# Altium PCB Esark Sign PCB 2.PcbDoc
Units mil, origin at the board's own origin, x right, y up, seen from the top; angles counter-clockwise.
Board outline 5360 x 2550 mil, 2 copper layers (Top Layer, Bottom Layer); 165 components, 74 nets, 331 pads, 48 vias.
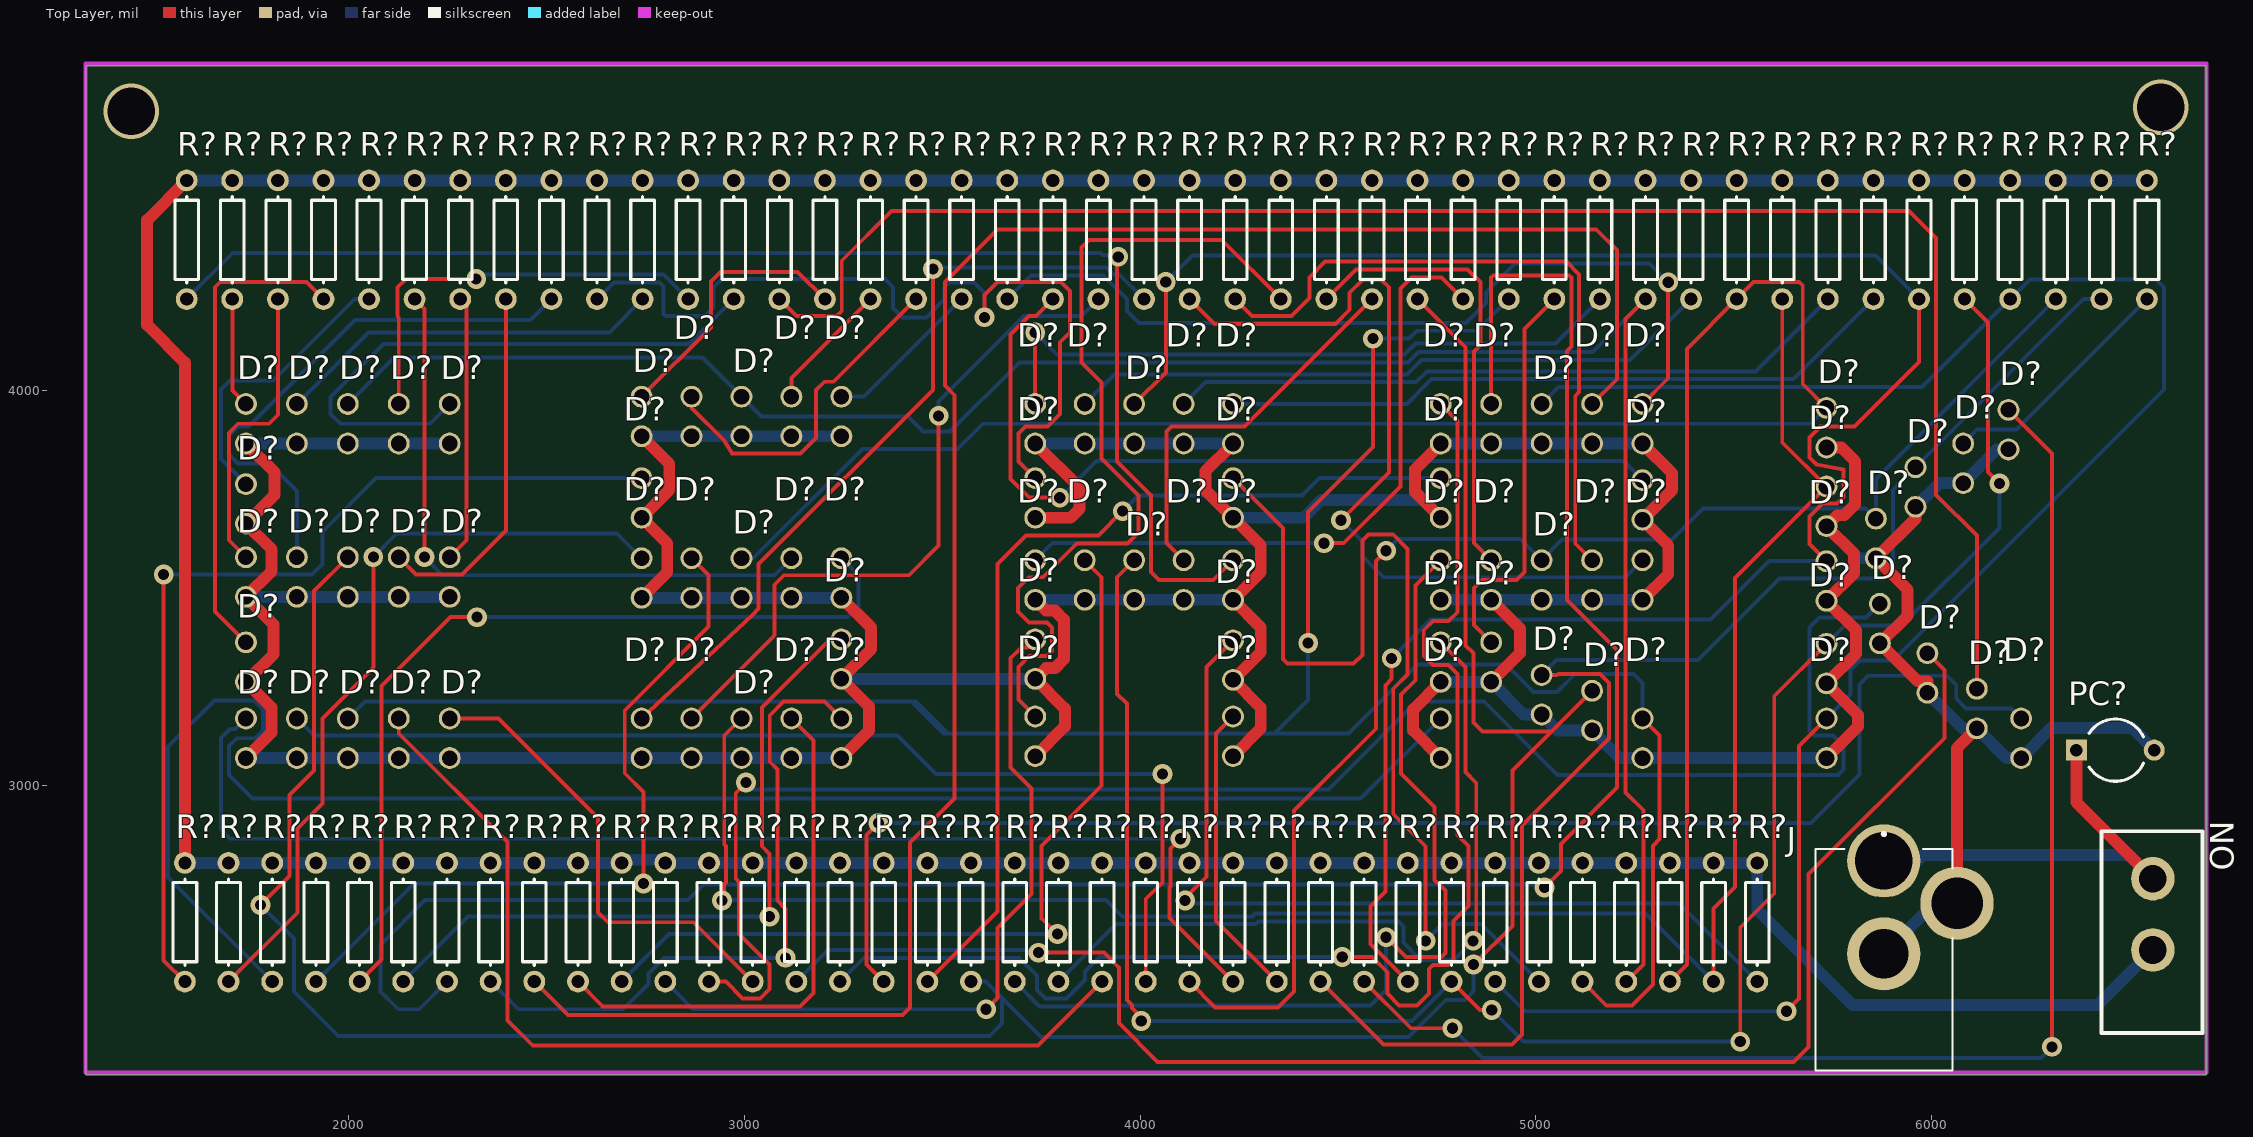
[diagram p0: Top Layer view]
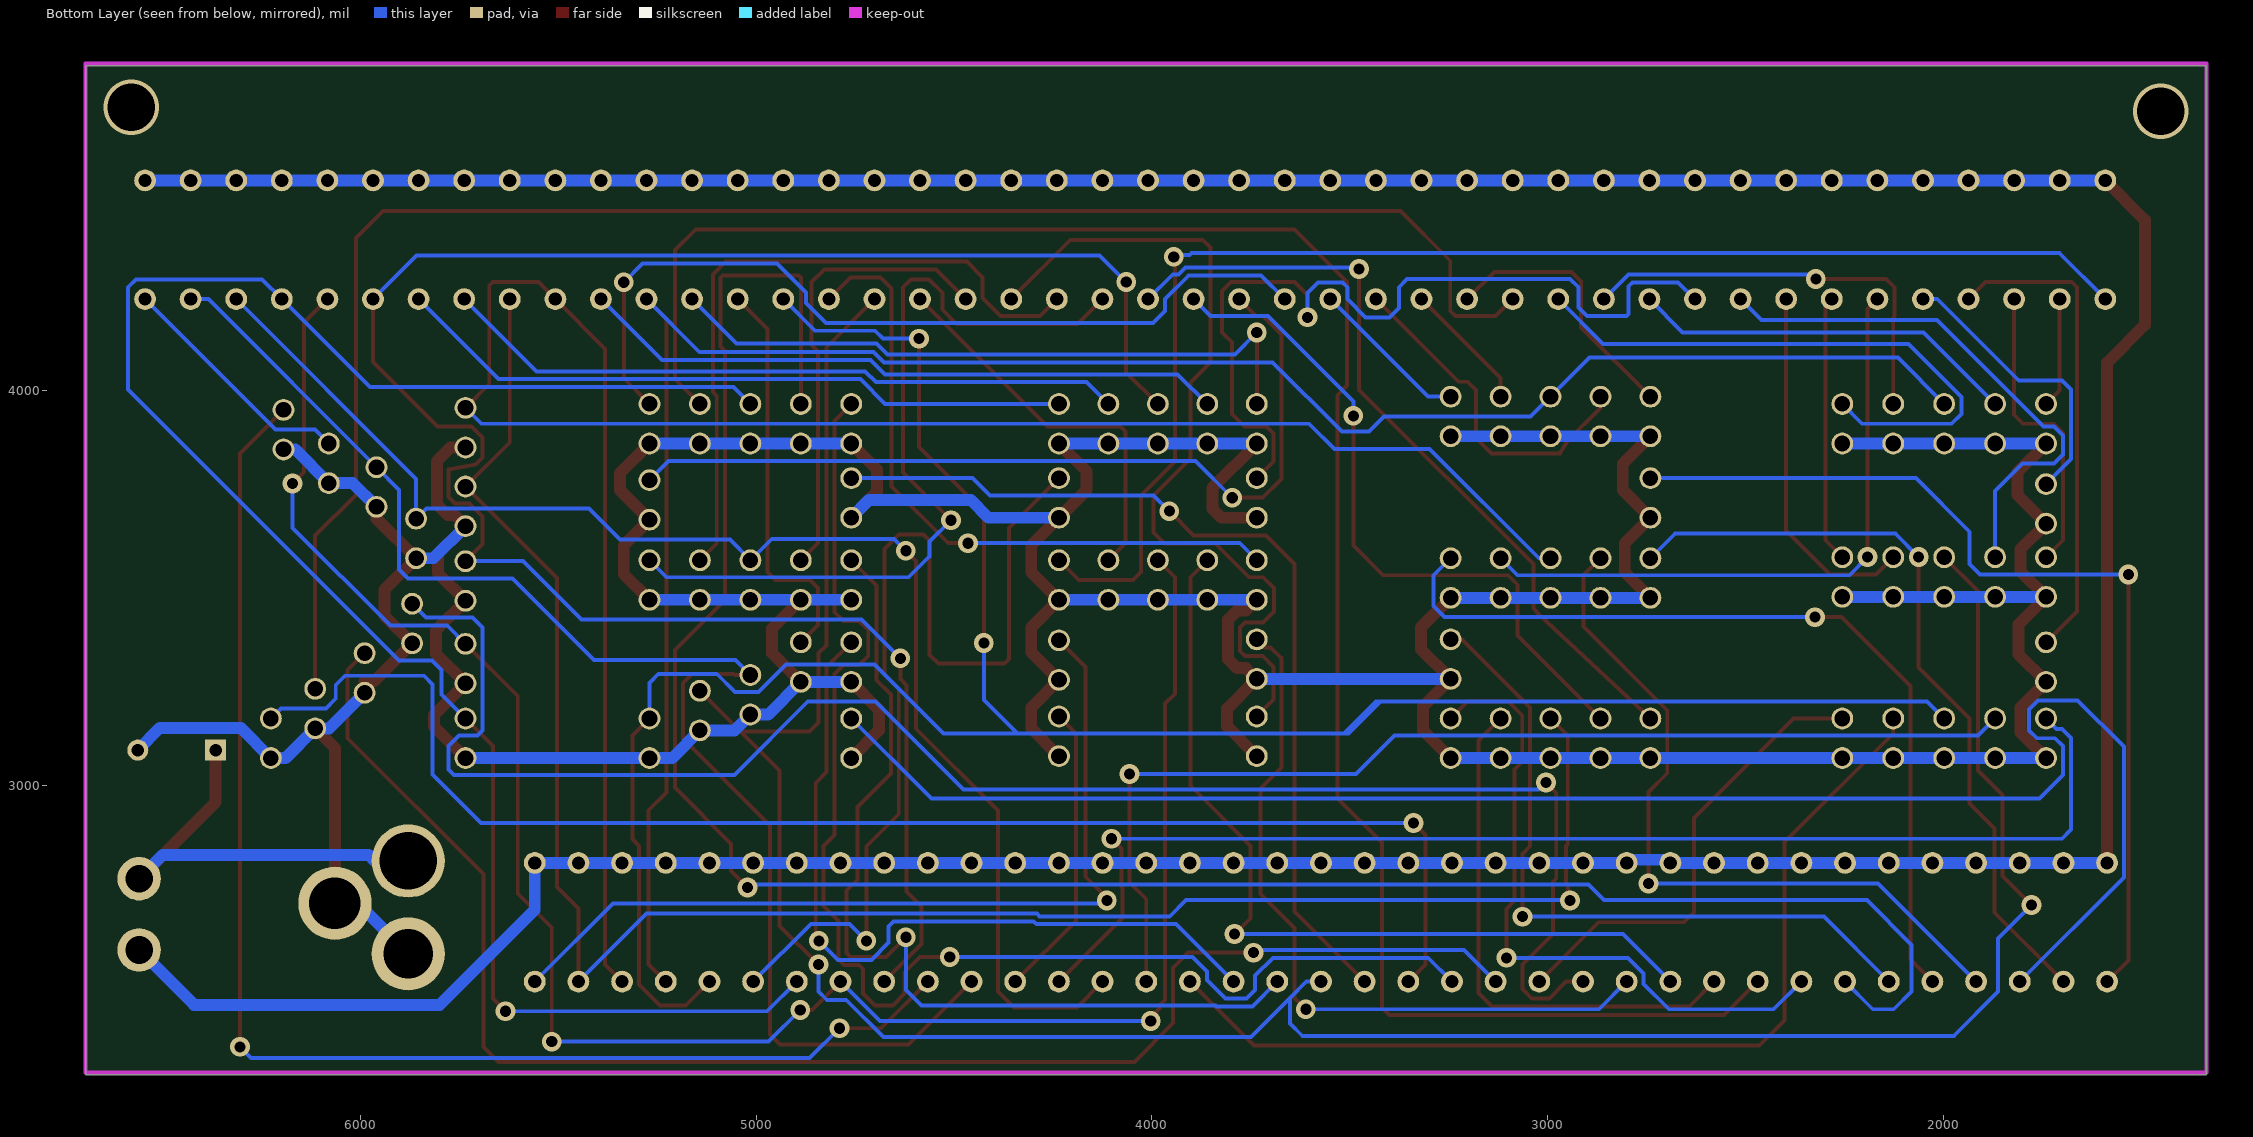
[diagram p1: Bottom Layer view, seen from below]

## Layer stack, top to bottom
Top Solder: solder mask 0.4, Solder Resist, Dk 3.5
Top Layer: signal copper 1.4
Dielectric 1: dielectric 12.6, FR-4, Dk 4.8
Bottom Layer: signal copper 1.4
Bottom Solder: solder mask 0.4, Solder Resist, Dk 3.5

## Board outline
1335,2270 6695,2270 6695,4820 1335,4820

## Design rules (kind name [scope] priority, off if disabled: settings)
Clearance [All] p1: gap=10 ignorepadtopadclearanceinfootprint=FALSE except(0: Arc-Hole Track-Hole SMDPad-Hole THPad-Hole Via-Hole Fill-Hole Poly-Hole Region-Hole Text-Hole)
PolygonConnect [All] p1: connectstyle=Relief reliefconductorwidth=10 reliefentries=4 polygonreliefangle="90 Angle" airgapwidth=10
RoomDefinition "Esark Sign Schematic2" [InComponentClass('Esark Sign Schematic2')] p1: confinementstyle=ConfineIn formatcopy=TRUE lockcomponents=FALSE outline 7045,1055 11915,1055 11915,1820 7045,1820
RoutingVias [All] p1: holewidth=28 width=50 viastyle="Through Hole" minholewidth=28 minwidth=50 maxholewidth=28 maxwidth=50
SolderMaskExpansion [All] p1: expansion=4 istentingtop=FALSE
Width GND [InNet('GND')] p1: maxlimit=30 minlimit=30 preferedwidth=30 minimp=50.000000 maximp=50.000000 favimp=50.000000
Width 5V_IN [InNet('5V_IN')] p2: maxlimit=30 minlimit=30 preferedwidth=30 minimp=50.000000 maximp=50.000000 favimp=50.000000
Width 5V [InNet('5V')] p3: maxlimit=30 minlimit=30 preferedwidth=30 minimp=50.000000 maximp=50.000000 favimp=50.000000
30 further rules are at their usual default settings.

## Classes and differential pairs
component class "Esark Sign Schematic2": PC?

## Components (designator, comment, footprint, x,y, rotation, side; value= is the part's Value field where it differs from the comment)
D? "LED0" LED-0 6115,3195 r90 top
D? "LED0" LED-0 2992.5,3525 r90 top
D? "LED0" LED-0 2992.5,3120 r90 top
D? "LED0" LED-0 5015,3915 r90 top
D? "LED0" LED-0 2992.5,3933.44 r90 top
D? "LED0" LED-0 1997.5,3120 r90 top
D? "LED0" LED-0 3985,3915 r90 top
D? "LED0" LED-0 1997.5,3527.5 r90 top
D? "LED0" LED-0 6080.52,3815 r90 top
D? "LED0" LED-0 3985,3520 r90 top
D? "LED0" LED-0 5015,3230 r90 top
D? "LED0" LED-0 5015,3520 r90 top
D? "LED0" LED-0 1997.5,3915 r90 top
D? "LED0" LED-0 6226.95,3120 r90 top
D? "LED0" LED-0 4887.5,3520 r90 top
D? "LED0" LED-0 5270,3520 r90 top
D? "LED0" LED-0 5735,3706.25 r90 top
D? "LED0" LED-0 5142.5,3190 r90 top
D? "LED0" LED-0 5142.5,3915 r90 top
D? "LED0" LED-0 6195,3900 r90 top
D? "LED0" LED-0 5735,3517.5 r90 top
D? "LED0" LED-0 5960,3755 r90 top
D? "LED0" LED-0 4887.5,3915 r90 top
D? "LED0" LED-0 5735,3905 r90 top
D? "LED0" LED-0 5735,3308.75 r90 top
D? "LED0" LED-0 5270,3915 r90 top
D? "LED0" LED-0 5990,3285 r90 top
D? "LED0" LED-0 5270,3120 r90 top
D? "LED0" LED-0 5270,3722.5 r90 top
D? "LED0" LED-0 5735,3120 r90 top
D? "LED0" LED-0 5142.5,3520 r90 top
D? "LED0" LED-0 4760,3120 r90 top
D? "LED0" LED-0 5870,3410 r90 top
D? "LED0" LED-0 5860,3625 r90 top
D? "LED0" LED-0 3245,3525 r90 top
D? "LED0" LED-0 2740,3120 r90 top
D? "LED0" LED-0 4760,3312.5 r90 top
D? "LED0" LED-0 4235,3125 r90 top
D? "LED0" LED-0 4760,3520 r90 top
D? "LED0" LED-0 4235,3317.5 r90 top
D? "LED0" LED-0 3860,3915 r90 top
D? "LED0" LED-0 4235,3520 r90 top
D? "LED0" LED-0 3735,3915 r90 top
D? "LED0" LED-0 4887.5,3312.5 r90 top
D? "LED0" LED-0 2866.25,3120 r90 top
D? "LED0" LED-0 3245,3120 r90 top
D? "LED0" LED-0 4110,3520 r90 top
D? "LED0" LED-0 3118.75,3120 r90 top
D? "LED0" LED-0 4110,3915 r90 top
D? "LED0" LED-0 4760,3727.5 r90 top
D? "LED0" LED-0 4760,3915 r90 top
D? "LED0" LED-0 3735,3125 r90 top
D? "LED0" LED-0 4235,3915 r90 top
D? "LED0" LED-0 4235,3727.5 r90 top
D? "LED0" LED-0 3860,3520 r90 top
D? "LED0" LED-0 3735,3520 r90 top
D? "LED0" LED-0 3735,3320 r90 top
D? "LED0" LED-0 3245,3320 r90 top
D? "LED0" LED-0 2740,3933.44 r90 top
D? "LED0" LED-0 3118.75,3933.44 r90 top
D? "LED0" LED-0 2740,3525 r90 top
D? "LED0" LED-0 2255,3915 r90 top
D? "LED0" LED-0 2866.25,3933.44 r90 top
D? "LED0" LED-0 2866.25,3525 r90 top
D? "LED0" LED-0 1868.75,3915 r90 top
D? "LED0" LED-0 3118.75,3525 r90 top
D? "LED0" LED-0 2740,3727.5 r90 top
D? "LED0" LED-0 2126.25,3915 r90 top
D? "LED0" LED-0 3245,3933.44 r90 top
D? "LED0" LED-0 2255,3527.5 r90 top
D? "LED0" LED-0 1740,3915 r90 top
D? "LED0" LED-0 1868.75,3527.5 r90 top
D? "LED0" LED-0 2126.25,3527.5 r90 top
D? "LED0" LED-0 1868.75,3120 r90 top
D? "LED0" LED-0 1740,3527.5 r90 top
D? "LED0" LED-0 1740,3712.5 r90 top
D? "LED0" LED-0 1740,3312.5 r90 top
D? "LED0" LED-0 2255,3120 r90 top
D? "LED0" LED-0 3735,3727.5 r90 top
D? "LED0" LED-0 2126.25,3120 r90 top
D? "LED0" LED-0 1740,3120 r90 top
J "EJ508A" MPD_EJ508A 5880,2702.95 r0 top
PC? "33u" CAPR5-4X5 6465,3090 r0 top
R? "Res1" AXIAL-0.3 3088.18,4380 r90 top value=200
R? "Res1" AXIAL-0.3 6084.09,4380 r90 top value=200
R? "Res1" AXIAL-0.3 5968.86,4380 r90 top value=200
R? "Res1" AXIAL-0.3 5118.4,2655 r90 top value=200
R? "Res1" AXIAL-0.3 5449.6,2655 r90 top value=200
R? "Res1" AXIAL-0.3 5228.8,2655 r90 top value=200
R? "Res1" AXIAL-0.3 6314.54,4380 r90 top value=200
R? "Res1" AXIAL-0.3 6545,4380 r90 top value=200
R? "Res1" AXIAL-0.3 5339.2,2655 r90 top value=200
R? "Res1" AXIAL-0.3 6199.32,4380 r90 top value=200
R? "Res1" AXIAL-0.3 6429.77,4380 r90 top value=200
R? "Res1" AXIAL-0.3 4701.36,4380 r90 top value=200
R? "Res1" AXIAL-0.3 3572.82,2655 r90 top value=200
R? "Res1" AXIAL-0.3 3352.02,2655 r90 top value=200
R? "Res1" AXIAL-0.3 4931.81,4380 r90 top value=200
R? "Res1" AXIAL-0.3 2248.03,2655 r90 top value=200
R? "Res1" AXIAL-0.3 4124.81,2655 r90 top value=200
R? "Res1" AXIAL-0.3 2468.83,2655 r90 top value=200
R? "Res1" AXIAL-0.3 3779.54,4380 r90 top value=200
R? "Res1" AXIAL-0.3 5623.18,4380 r90 top value=200
R? "Res1" AXIAL-0.3 4566.41,2655 r90 top value=200
R? "Res1" AXIAL-0.3 5507.95,4380 r90 top value=200
R? "Res1" AXIAL-0.3 4676.81,2655 r90 top value=200
R? "Res1" AXIAL-0.3 4240.45,4380 r90 top value=200
R? "Res1" AXIAL-0.3 4787.21,2655 r90 top value=200
R? "Res1" AXIAL-0.3 2910.43,2655 r90 top value=200
R? "Res1" AXIAL-0.3 3664.32,4380 r90 top value=200
R? "Res1" AXIAL-0.3 4125.22,4380 r90 top value=200
R? "Res1" AXIAL-0.3 3131.22,2655 r90 top value=200
R? "Res1" AXIAL-0.3 4897.6,2655 r90 top value=200
R? "Res1" AXIAL-0.3 4456.01,2655 r90 top value=200
R? "Res1" AXIAL-0.3 4470.91,4380 r90 top value=200
R? "Res1" AXIAL-0.3 1806.44,2655 r90 top value=200
R? "Res1" AXIAL-0.3 5277.5,4380 r90 top value=200
R? "Res1" AXIAL-0.3 5853.63,4380 r90 top value=200
R? "Res1" AXIAL-0.3 3894.77,4380 r90 top value=200
R? "Res1" AXIAL-0.3 2137.64,2655 r90 top value=200
R? "Res1" AXIAL-0.3 3462.42,2655 r90 top value=200
R? "Res1" AXIAL-0.3 1590.23,4380 r90 top value=200
R? "Res1" AXIAL-0.3 3793.62,2655 r90 top value=200
R? "Res1" AXIAL-0.3 2027.24,2655 r90 top value=200
R? "Res1" AXIAL-0.3 5047.04,4380 r90 top value=200
R? "Res1" AXIAL-0.3 4816.59,4380 r90 top value=200
R? "Res1" AXIAL-0.3 3241.62,2655 r90 top value=200
R? "Res1" AXIAL-0.3 5738.41,4380 r90 top value=200
R? "Res1" AXIAL-0.3 5560,2655 r90 top value=200
R? "Res1" AXIAL-0.3 4345.61,2655 r90 top value=200
R? "Res1" AXIAL-0.3 2579.23,2655 r90 top value=200
R? "Res1" AXIAL-0.3 2800.03,2655 r90 top value=200
R? "Res1" AXIAL-0.3 3683.22,2655 r90 top value=200
R? "Res1" AXIAL-0.3 4586.13,4380 r90 top value=200
R? "Res1" AXIAL-0.3 5162.27,4380 r90 top value=200
R? "Res1" AXIAL-0.3 5392.72,4380 r90 top value=200
R? "Res1" AXIAL-0.3 4355.68,4380 r90 top value=200
R? "Res1" AXIAL-0.3 2358.43,2655 r90 top value=200
R? "Res1" AXIAL-0.3 2689.63,2655 r90 top value=200
R? "Res1" AXIAL-0.3 4010,4380 r90 top value=200
R? "Res1" AXIAL-0.3 5008.01,2655 r90 top value=200
R? "Res1" AXIAL-0.3 1696.04,2655 r90 top value=200
R? "Res1" AXIAL-0.3 1916.84,2655 r90 top value=200
R? "Res1" AXIAL-0.3 3318.63,4380 r90 top value=200
R? "Res1" AXIAL-0.3 2166.36,4380 r90 top value=200
R? "Res1" AXIAL-0.3 2742.5,4380 r90 top value=200
R? "Res1" AXIAL-0.3 2972.95,4380 r90 top value=200
R? "Res1" AXIAL-0.3 3549.09,4380 r90 top value=200
R? "Res1" AXIAL-0.3 3203.41,4380 r90 top value=200
R? "Res1" AXIAL-0.3 3433.86,4380 r90 top value=200
R? "Res1" AXIAL-0.3 1585.64,2655 r90 top value=200
R? "Res1" AXIAL-0.3 2857.73,4380 r90 top value=200
R? "Res1" AXIAL-0.3 1705.45,4380 r90 top value=200
R? "Res1" AXIAL-0.3 4014.41,2655 r90 top value=200
R? "Res1" AXIAL-0.3 3020.83,2655 r90 top value=200
R? "Res1" AXIAL-0.3 2281.59,4380 r90 top value=200
R? "Res1" AXIAL-0.3 2051.14,4380 r90 top value=200
R? "Res1" AXIAL-0.3 1935.91,4380 r90 top value=200
R? "Res1" AXIAL-0.3 1820.68,4380 r90 top value=200
R? "Res1" AXIAL-0.3 4235.21,2655 r90 top value=200
R? "Res1" AXIAL-0.3 2396.82,4380 r90 top value=200
R? "Res1" AXIAL-0.3 2512.04,4380 r90 top value=200
R? "Res1" AXIAL-0.3 3904.02,2655 r90 top value=200
R? "Res1" AXIAL-0.3 2627.27,4380 r90 top value=200
? "SPST Switch" "SPST Switch" 6560,2585 r90 top

## Footprints (in the part's own frame and the unit in brackets; to place one, negate y for a bottom-side part, rotate by r counter-clockwise, add the part's x,y. Pads: shape width x height; smd on the part's side, far side on the other; paste and mask are expansions set on the pad)
AXIAL-0.3 [mm] "Axial Device, Thru-Hole; 2 Leads; 0.3 in Pin Spacing"
  round 1.4 hole 0.85: 1(-3.81,0) 2(3.81,0)
  silkscreen extent -2.77,-0.76 2.77,0.76
CAPR5-4X5 [mm] "Capacitor; 2 Leads"
  rect 1.35x1.35 hole 0.8: 1(-2.5,0)
  round 1.35 hole 0.8: 2(2.5,0)
  silkscreen extent -1.69,-2 1.82,2
LED-0 [mm] "LED; 2 Leads"
  round 1.4 hole 1: 1(1.27,0) 2(-1.27,0)
MPD_EJ508A [mil]
  round 185 hole 145: 1(0,107)
  round 185 hole 125: 2(0,-127.95)
  round 185 hole 130: 3(185,0)
  silkscreen extent -173,-423 173,179
"SPST Switch" [mil] "SW"
  round 110 hole 70: 1(0,0) 2(180,0)
  silkscreen extent -210,-125 300,130

## Part data
D? D? D? D? D? D? D? D? D? D? D? D? D? D? D? D? D? D? D? D? D? D? D? D? D? D? D? D? D? D? D? D? D? D? D? D? D? D? D? D? D? D? D? D? D? D? D? D? D? D? D? D? D? D? D? D? D? D? D? D? D? D? D? D? D? D? D? D? D? D? D? D? D? D? D? D? D? D? D? D? D?: "Typical INFRARED GaAs LED", LatestRevisionDate=08-Jul-2005, LatestRevisionNote="Mech Layer 1 removed.", PackageDescription="LED; 2 Leads", PackageReference=LED-0, Published=8-Jun-2000, Publisher="Altium Limited"
J: "Power Barrel Connector Jack 2.10mm ID _0.083_, 5.50mm OD _0.217_ Through Hole, Right Angle", Package="Non-Standard MPD", Availability=Unavailable, MF=MPD, MP=EJ508A, Price=None, SnapEDA_Link=https://www.snapeda.com/parts/EJ508A/MPD%20%28Memory%20Protection%20Devices%29/view-part/474399/?ref=snap
PC?: library part Cap2, "Capacitor", PackageDescription="Capacitor; 2 Leads", PackageReference=CAPR5-4X5, Published=23-Sep-2002, Publisher="Altium Limited"
R? R? R? R? R? R? R? R? R? R? R? R? R? R? R? R? R? R? R? R? R? R? R? R? R? R? R? R? R? R? R? R? R? R? R? R? R? R? R? R? R? R? R? R? R? R? R? R? R? R? R? R? R? R? R? R? R? R? R? R? R? R? R? R? R? R? R? R? R? R? R? R? R? R? R? R? R? R? R? R? R?: "Resistor", LatestRevisionDate=17-Jul-2002, LatestRevisionNote="Re-released for DXP Platform.", PackageDescription="Axial Device, Thru-Hole; 2 Leads; 0.3 in Pin Spacing", PackageReference=AXIAL-0.3, Published=8-Jun-2000, Publisher="Altium Limited"

## Via types
v1: diameter 50, hole 28, Top Layer to Bottom Layer, 46 vias
v2: diameter 140, hole 120, Top Layer to Bottom Layer, 2 vias

## Nets (pads, with @x,y where several pads share a name; then routed paths per layer and width w, separated by ;. In a path a pad name is that pad's centre, name@x,y a point inside that pad or via, vN(x,y) a via of type N, cw(c..) or ccw(c..) an arc to the next point about the centre after c; other vN are vias at no path point)
5V: ?.1 R?.2 | length 12017.9
  Top Layer w30: R?.2@1585.64,2805 1585.64,4069.36 1490,4165 1490,4429.77 R?.2@1590.23,4530
  Bottom Layer w30: R?.2@1585.64,2805 1696.04,2805 1806.44,2805 1916.84,2805 2027.24,2805 2137.64,2805 2248.03,2805 2358.43,2805 2468.83,2805 2579.23,2805 2689.63,2805 2697.63,2813 2792.03,2813 2800.03,2805 2910.43,2805 3020.83,2805 3131.23,2805 3241.62,2805 3352.02,2805 3462.42,2805 3572.82,2805 3683.22,2805 3793.62,2805 3904.02,2805 4014.42,2805 4124.81,2805 4235.21,2805 4345.61,2805 4456.01,2805 4566.41,2805 4676.81,2805 4787.21,2805 4897.61,2805 5008,2805 5118.4,2805 5228.8,2805 5339.2,2805 5449.6,2805 5560,2805 5560,2686 5800,2446 6421,2446 ?.1 ; R?.2@1590.23,4530 1705.45,4530 1820.68,4530 1935.91,4530 2051.14,4530 2166.36,4530 2281.59,4530 2396.82,4530 2512.04,4530 2627.27,4530 2742.5,4530 2857.73,4530 2972.95,4530 3088.18,4530 3203.41,4530 3318.64,4530 3433.86,4530 3549.09,4530 3664.32,4530 3779.54,4530 3894.77,4530 4010,4530 4125.23,4530 4240.45,4530 4355.68,4530 4470.91,4530 4586.13,4530 4701.36,4530 4816.59,4530 4931.82,4530 5047.04,4530 5162.27,4530 5277.5,4530 5392.72,4530 5507.95,4530 5623.18,4530 5738.41,4530 5853.63,4530 5968.86,4530 6084.09,4530 6199.32,4530 6314.54,4530 6429.77,4530 R?.2@6545,4530
5V_IN: ?.2 J.1 PC?.1 | length 1116.4
  Top Layer w30: PC?.1 6366.57,2958.43 ?.2
  Bottom Layer w30: J.1@5880,2809.45 5964.45,2809.45 5980,2825 6500,2825 ?.2
GND: D?.2 J.2 J.3 PC?.2 | length 16458.7
  Top Layer w30: D?.2@1740,3070 1805,3135 1805,3197.5 1740,3262.5 1810,3332.5 1810,3407.5 1740,3477.5 1805,3542.5 1805,3597.5 1740,3662.5 1812.56,3735.06 1812.56,3792.44 D?.2@1740,3865 ; D?.2@2740,3475 2805,3540 2805,3612.5 2740,3677.5 2810,3747.5 2810,3813.44 D?.2@2740,3883.44 ; D?.2@3245,3070 3315,3140 3315,3200 3245,3270 3320,3345 3320,3400 D?.2@3245,3475 ; D?.2@3735,3075 3810,3150 3810,3195 3735,3270 3762.44,3297.44 3785,3297.44 3807.56,3320 3807.56,3420 3785,3442.56 3762.44,3442.56 D?.2@3735,3470 ; D?.2@3735,3677.5 3824.5,3677.5 3847,3700 3847,3753 D?.2@3735,3865 ; D?.2@4235,3075 4305,3145 4305,3197.5 4235,3267.5 4305,3337.5 4305,3400 4235,3470 4305,3540 4305,3607.5 4165,3747.5 4165,3795 D?.2@4235,3865 ; D?.2@4760,3070 4690,3140 4690,3192.5 D?.2@4760,3262.5 ; D?.2@4760,3677.5 4695,3742.5 4695,3800 D?.2@4760,3865 ; D?.2@4887.5,3262.5 4960,3335 4960,3397.5 D?.2@4887.5,3470 ; D?.2@5270,3470 5335,3535 5335,3607.5 5270,3672.5 5345,3747.5 5345,3790 D?.2@5270,3865 ; D?.2@5735,3070 5815,3150 5815,3178.75 5735,3258.75 5810,3333.75 5810,3392.5 5735,3467.5 5805,3537.5 5805,3586.25 5735,3656.25 5762.44,3683.69 5780,3683.69 5807.56,3711.25 5807.56,3820 5772.56,3855 D?.2@5735,3855 ; D?.2@5960,3705 5960,3675 5860,3575 5940,3495 5940,3430 5870,3360 5966,3264 5990,3264 D?.2@5990,3235 ; J.3@6064.65,2702.95 6064.65,3094.65 D?.2@6115,3145
  Bottom Layer w30: D?.2@1740,3070 1868.75,3070 1997.5,3070 2126.25,3070 2255,3070 2740,3070 2866.25,3070 2992.5,3070 3118.75,3070 D?.2@3245,3070 ; D?.2@1740,3477.5 1868.75,3477.5 1997.5,3477.5 2126.25,3477.5 D?.2@2255,3477.5 ; D?.2@1740,3865 1868.75,3865 1997.5,3865 2126.25,3865 D?.2@2255,3865 ; D?.2@2740,3475 2866.25,3475 2992.5,3475 3118.75,3475 D?.2@3245,3475 ; D?.2@2740,3883.44 2866.25,3883.44 2992.5,3883.44 3118.75,3883.44 D?.2@3245,3883.44 ; D?.2@3245,3270 D?.2@3735,3270 ; D?.2@3735,3470 3860,3470 3985,3470 4110,3470 D?.2@4235,3470 ; D?.2@3735,3865 3860,3865 3985,3865 4110,3865 D?.2@4235,3865 ; D?.2@4235,3677.5 4413.2,3677.5 4458.08,3722.38 4715.12,3722.38 D?.2@4760,3677.5 ; D?.2@4760,3262.5 4887.5,3262.5 4970,3180 5015,3180 5055,3140 5142.5,3140 5212.5,3070 5270,3070 D?.2@5735,3070 ; D?.2@4760,3470 4887.5,3470 5015,3470 5142.5,3470 D?.2@5270,3470 ; D?.2@4760,3865 4887.5,3865 5015,3865 5142.5,3865 D?.2@5270,3865 ; D?.2@5735,3656.25 5816.25,3575 D?.2@5860,3575 ; J.2 6007.95,2702.95 J.3@6064.65,2702.95 ; D?.2@5960,3705 6020,3765 6080.52,3765 6165.52,3850 D?.2@6195,3850 ; D?.2@5990,3235 6080,3145 6115,3145 6190,3070 6226.95,3070 6302.95,3146 6507.43,3146 PC?.2
LED1: D?.1@1740,3965 R?.1@1705.45,4230 | length 279.3
  Top Layer w10: R?.1@1705.45,4230 1705.45,3999.55 D?.1@1740,3965
NetD?_1: D?.1@6080.52,3865 R?.1@6545,4230 | length 615.7
  Bottom Layer w10: D?.1@6080.52,3865 6115.52,3900 6215,3900 R?.1@6545,4230
NetLabel92: D?.1@1740,3762.5 R?.1@2051.14,4230 | length 733.6
  Bottom Layer w10: D?.1@1740,3762.5 1677,3825.5 1677,4001 1700,4024 1809,4024 2015,4230 R?.1@2051.14,4230
NetLabel93: D?.1@1740,3577.5 R?.1@1820.68,4230 | length 767.2
  Top Layer w10: D?.1@1740,3577.5 1697,3620.5 1697,3892 1720,3915 1798,3915 1820.68,3937.68 R?.1@1820.68,4230
NetLabel94: D?.1@1740,3362.5 R?.1@1935.91,4230 | length 1226.9
  Top Layer w10: D?.1@1740,3362.5 1662,3440.5 1662,4260 1675,4273 1892.91,4273 R?.1@1935.91,4230
NetLabel95: D?.1@2255,3577.5 R?.1@2281.59,4230 | length 686.7
  Top Layer w10: D?.1@2255,3577.5 2298,3620.5 2298,4230 R?.1@2281.59,4230
NetLabel96: D?.1@2126.25,3577.5 R?.1@2396.82,4230 | length 919.7
  Top Layer w10: D?.1@2126.25,3577.5 2169.75,3534 2286,3534 2396.82,3644.82 R?.1@2396.82,4230
NetLabel97: D?.1@1868.75,3577.5 R?.1@2512.04,4230 | length 1383.5
  Bottom Layer w10: D?.1@1868.75,3577.5 1868.75,3745.25 1800,3814 1720,3814 1697,3837 1697,3885 1720,3908 1747,3908 2016,4177 2459.04,4177 R?.1@2512.04,4230
NetLabel98: D?.1@3735,3777.5 R?.1@2627.27,4230 | length 2212.3
  Top Layer w10: v1(3607,4184) 3607,4240 3640,4273 3800,4273 3823,4250 3823,4146 3798,4121 3798,3940 3766,3908 3710,3908 3692.44,3890.44 3692.44,3820.06 D?.1@3735,3777.5
  Bottom Layer w10: R?.1@2627.27,4230 2669.83,4272.56 2785,4272.56 2795,4262.56 2795,4192.86 2800.86,4187 2900,4187 2922,4209 2922,4260 2943,4281 3355,4281 3376,4260 3376,4208 3400,4184 3460,4184 3506,4230 3506,4260 3518.56,4272.56 3580,4272.56 3607,4245.56 v1(3607,4184)
NetLabel99: D?.1@2255,3170 R?.1@3020.83,2505 | length 1180.7
  Top Layer w10: D?.1@2255,3170 2378,3170 2630,2918 2630,2680 2655,2655 2870.83,2655 R?.1@3020.83,2505
NetLabel100: D?.1@2126.25,3170 R?.1@3904.02,2505 | length 2473.5
  Top Layer w10: D?.1@2126.25,3170 2126.25,3132.25 2401,2857.5 2401,2406.92 2464.92,2343 3742.02,2343 R?.1@3904.02,2505
NetLabel101: D?.1@1868.75,3170 R?.1@4014.42,2505 | length 2788.8
  Top Layer w10: R?.1@4014.42,2505 4014.42,2713.42 4056.98,2755.98 v1(4056.98,3030)
  Bottom Layer w10: D?.1@1868.75,3170 1911.75,3127 3387,3127 3484,3030 v1(4056.98,3030)
NetLabel102: D?.1@1740,3170 R?.1@4235.21,2505 | length 3189
  Top Layer w10: v1(4102,2866) 4076.98,2840.98 4076.98,2745.42 4074,2742.44 4074,2666.21 R?.1@4235.21,2505
  Bottom Layer w10: D?.1@1740,3170 1713.58,3143.58 1700,3143.58 1677,3120.58 1677,2889 1700,2866 v1(4102,2866)
NetLabel103: D?.1@1868.75,3965 R?.1@2742.5,4230 | length 983.5
  Bottom Layer w10: D?.1@1868.75,3965 2049.75,4146 2658.5,4146 R?.1@2742.5,4230
NetLabel104: D?.1@2126.25,3965 R?.1@2857.73,4230 | length 1070.5
  Top Layer w10: D?.1@2126.25,3965 2126.25,4183.75 2123,4187 2123,4260 2144,4281 v1(2322,4281)
  Bottom Layer w10: v1(2322,4281) 2333.56,4292.56 2795.17,4292.56 R?.1@2857.73,4230
NetLabel105: D?.1@2255,3965 R?.1@2972.95,4230 | length 1496.3
  Bottom Layer w10: D?.1@2255,3965 2205,3915 1979,3915 1954,3940 1954,3983 2088,4117 2859.95,4117 R?.1@2972.95,4230
NetLabel106: D?.1@6115,3245 R?.1@3088.18,4230 | length 4337
  Top Layer w10: R?.1@3088.18,4230 3131.18,4187 3233,4187 3246,4200 3246,4327 3372,4453 5944,4453 6012,4385 6012,3735 6115,3632 D?.1@6115,3245
NetLabel107: D?.1@2740,3983.44 R?.1@3203.41,4230 | length 690.4
  Top Layer w10: D?.1@2740,3983.44 2915,4158.44 2915,4274 2940,4299 3134.41,4299 R?.1@3203.41,4230
NetLabel108: D?.1@3118.75,3983.44 R?.1@3318.64,4230 | length 329.4
  Top Layer w10: D?.1@3118.75,3983.44 3118.75,4030.11 R?.1@3318.64,4230
NetLabel109: D?.1@2866.25,3983.44 R?.1@3433.86,4230 | length 880.5
  Top Layer w10: D?.1@2866.25,3983.44 2866.25,3955 2949,3872.25 2969,3840 3142,3840 3181.31,3879.31 3181.31,4000 3202.41,4021.1 3224.96,4021.1 R?.1@3433.86,4230
NetLabel110: D?.1@3245,3983.44 R?.1@3549.09,4230 | length 406.2
  Bottom Layer w10: D?.1@3245,3983.44 3302.53,3983.44 R?.1@3549.09,4230
NetLabel111: D?.1@2740,3777.5 R?.1@1585.64,2505 | length 2408.1
  Top Layer w10: v1(1532,3534) 1532,2558.64 R?.1@1585.64,2505
  Bottom Layer w10: v1(1532,3534) 1907,3534 1933,3560 1933,3642 2068.5,3777.5 D?.1@2740,3777.5
NetLabel112: D?.1@2740,3575 R?.1@1696.04,2505 | length 1952.7
  Top Layer w10: R?.1@1696.04,2505 1870,2678.96 1870,2892 1933,2955 1933,3170 2062,3299 v1(2062,3578)
  Bottom Layer w10: v1(2062,3578) 2121,3637 2678,3637 D?.1@2740,3575
NetLabel113: D?.1@2866.25,3575 R?.1@1916.84,2505 | length 1877.9
  Top Layer w10: v1(2745,2753) 2745,2984 2697.44,3031.56 2697.44,3190.44 2909,3402 2909,3532.25 D?.1@2866.25,3575
  Bottom Layer w10: R?.1@1916.84,2505 2164.84,2753 v1(2745,2753)
NetLabel114: D?.1@3118.75,3575 R?.1@2166.36,4230 | length 1626.8
  Top Layer w10: R?.1@2166.36,4230 2191,4205.36 v1(2191,3578)
  Bottom Layer w10: v1(2191,3578) 2237,3532 3075.75,3532 D?.1@3118.75,3575
NetLabel115: D?.1@4760,3362.5 R?.1@3793.62,2505 | length 1990.2
  Top Layer w10: D?.1@4760,3362.5 4822.56,3299.94 4822.56,3034.65 4849.77,3007.44 4849.77,2615.77 v1(4842,2608)
  Bottom Layer w10: R?.1@3793.62,2505 3938.62,2650 4292.24,2650 4299.24,2657 4652.85,2657 4665.71,2644.14 4665.71,2603.29 4709,2560 4794,2560 v1(4842,2608)
NetLabel116: D?.1@4760,3570 R?.1@3683.22,2505 | length 2370.6
  Top Layer w10: v1(4622,2617) 4672,2567 4762,2567 4772,2577 4772,2734.65 4744.65,2762 4744.65,2946 4660,3030.65 4660,3230.5 4696.17,3266.67 4696.17,3506.17 D?.1@4760,3570
  Bottom Layer w10: R?.1@3683.22,2505 3745.78,2442.44 3836.62,2442.44 3839.18,2445 4583,2445 4622,2484 v1(4622,2617)
NetLabel117: D?.1@4760,3777.5 R?.1@3462.42,2505 | length 2339.2
  Top Layer w10: R?.1@3462.42,2505 3640,2682.58 3640,3561 3711.56,3632.56 3894.56,3632.56 v1(3956,3694)
  Bottom Layer w10: v1(3956,3694) 3996,3734 4409.7,3734 4453.2,3777.5 D?.1@4760,3777.5
NetLabel118: D?.1@4760,3965 R?.1@3241.62,2505 | length 3426.9
  Top Layer w10: v1(4511,2567) 4586.5,2567 4625,2528.5 4625,2475 4655,2445 4700,2445 4730,2475 4730,2537 4740,2547 4778,2547 4792,2561 4792,2658 4829.77,2695.77 4829.77,2848 4802.56,2875.21 4802.56,3282.5 4780,3305.06 4740,3305.06 4717,3328.06 4717,3393 4740,3416 4780,3416 4802.56,3438.56 4802.56,3922.44 D?.1@4760,3965
  Bottom Layer w10: R?.1@3241.62,2505 3301.62,2565 3694,2565 3739,2520 3739,2484 3760.56,2462.44 3814.44,2462.44 3861,2509 3861,2530 3898,2567 v1(4511,2567)
NetLabel119: D?.1@3735,3370 R?.1@2800.03,2505 | length 1879.4
  Top Layer w10: v1(3611,2435) 3640,2464 3640,2640 3726,2726 3726,2993 3672.44,3046.56 3672.44,3322.3 3700,3349.86 3714.86,3349.86 D?.1@3735,3370
  Bottom Layer w10: R?.1@2800.03,2505 2870.03,2435 v1(3611,2435)
NetLabel120: D?.1@3860,3570 R?.1@2689.63,2505 | length 2193.4
  Top Layer w10: v1(3791,2625) 3751,2665 3751,2848 3903,3000 3903,3527 D?.1@3860,3570
  Bottom Layer w10: R?.1@2689.63,2505 2809.63,2625 v1(3791,2625)
NetLabel121: D?.1@4235,3175 R?.1@4345.61,2505 | length 751.4
  Top Layer w10: D?.1@4235,3175 4192,3132 4192,2658.61 R?.1@4345.61,2505
NetLabel122: D?.1@4235,3367.5 R?.1@5560,2505 | length 2238.5
  Top Layer w10: v1(4114,2710) 4114,2716 4168,2770 4168,3300.5 D?.1@4235,3367.5
  Bottom Layer w10: v1(4114,2710) 4121.56,2702.44 5362.56,2702.44 R?.1@5560,2505
NetLabel123: D?.1@4235,3570 R?.1@1590.23,4230 | length 3476.3
  Top Layer w10: v1(3944.93,4336.93) 3942,4334 3942,3820 4028,3734 4028,3540 4048,3520 4185,3520 D?.1@4235,3570
  Bottom Layer w10: R?.1@1590.23,4230 1706.23,4346 3899.93,4346 3904.93,4341 3940.85,4341 v1(3944.93,4336.93)
NetLabel124: D?.1@4235,3777.5 R?.1@5008,2505 | length 2552.8
  Top Layer w10: D?.1@4235,3777.5 4361,3651.5 4361,3320 4372,3309 4540,3309 4562,3331 4562,3620 4577,3635 4640,3635 4676.17,3598.83 4676.17,3281.36 4640,3245.19 4640,2929 4722,2847 v1(4722,2608)
  Bottom Layer w10: v1(4722,2608) 4765,2651 4862,2651 R?.1@5008,2505
NetLabel125: D?.1@4235,3965 R?.1@5853.63,4230 | length 1728.4
  Bottom Layer w10: D?.1@4235,3965 4674.44,3965 4737,4027.56 5651.19,4027.56 R?.1@5853.63,4230
NetLabel126: D?.1@4110,3965 R?.1@5738.41,4230 | length 1738.2
  Bottom Layer w10: D?.1@4110,3965 4165,4020 4697.44,4020 4725,4047.56 5555.97,4047.56 R?.1@5738.41,4230
NetLabel127: D?.1@3860,3965 R?.1@5392.72,4230 | length 1642.5
  Bottom Layer w10: D?.1@3860,3965 3935,4040 4675,4040 4711,4076 5238.72,4076 R?.1@5392.72,4230
NetLabel128: D?.1@3735,3965 R?.1@5162.27,4230 | length 1688.9
  Top Layer w10: D?.1@3735,3965 v1(3735,4145.6)
  Bottom Layer w10: v1(3735,4145.6) 3790.6,4090 4668.43,4090 4696.23,4117.8 5050.07,4117.8 R?.1@5162.27,4230
NetLabel129: D?.1@4887.5,3362.5 R?.1@5047.04,4230 | length 1021.2
  Top Layer w10: D?.1@4887.5,3362.5 4844,3406 4844,3500 4864,3520 4952,3520 4972,3540 4972,4154.96 R?.1@5047.04,4230
NetLabel130: D?.1@3735,3570 R?.1@4816.59,4230 | length 1693.9
  Top Layer w10: v1(4465,3613) 4514.81,3613 4658,3756.19 4658,4257 4686,4285 4761.59,4285 R?.1@4816.59,4230
  Bottom Layer w10: D?.1@3735,3570 3778,3613 v1(4465,3613)
NetLabel131: D?.1@4110,3570 R?.1@4586.13,4230 | length 1000.7
  Top Layer w10: D?.1@4110,3570 4067,3613 4067,3895 4080,3908 4264.13,3908 R?.1@4586.13,4230
NetLabel132: D?.1@3735,3175 R?.1@4355.68,4230 | length 2182.2
  Top Layer w10: D?.1@3735,3175 3692.44,3217.56 3692.44,3300 3719.88,3327.44 3765,3327.44 3777.56,3340 3777.56,3400 3765,3412.56 3719.44,3412.56 3692,3440 3692,3500 3719,3527 3754.44,3527 3840,3612.56 3968.56,3612.56 3996,3640 3996,3734 3903,3827 3903,4019 3852,4070 3852,4360 3872,4380 4205.68,4380 R?.1@4355.68,4230
NetLabel133: D?.1@2740,3170 R?.1@4010,4230 | length 2014.8
  Top Layer w10: D?.1@2740,3170 3020,3432 3036,3448 3036,3560.32 3476.53,4000.85 v1(3476.53,4306)
  Bottom Layer w10: v1(3476.53,4306) 3480.53,4310 3915.28,4310 3932.72,4292.56 3947.44,4292.56 R?.1@4010,4230
NetLabel134: D?.1@2866.25,3170 R?.1@3894.77,4230 | length 1756.2
  Top Layer w10: D?.1@2866.25,3170 3076,3379.75 3076,3508 3100,3532 3416,3532 3491,3607 v1(3491,3935)
  Bottom Layer w10: v1(3491,3935) 3491,3971.44 3707,4187.44 3852.21,4187.44 R?.1@3894.77,4230
NetLabel135: D?.1@3118.75,3170 R?.1@2579.23,2505 | length 1351.5
  Top Layer w10: R?.1@2579.23,2505 2641.79,2442.44 3140.44,2442.44 3174,2476 3174,3114.75 D?.1@3118.75,3170
NetLabel136: D?.1@3245,3170 R?.1@2358.43,2505 | length 1686.5
  Top Layer w10: v1(3104,2565) 3104,2689 3083.39,2709.61 3083.39,3041.31 3064,3060.69 3064,3178 3099,3213 3202,3213 D?.1@3245,3170
  Bottom Layer w10: R?.1@2358.43,2505 2428.43,2435 2693,2435 2757,2499 2757,2525 2797,2565 v1(3104,2565)
NetLabel137: D?.1@3245,3370 R?.1@2137.64,2505 | length 1803
  Top Layer w10: v1(3063.39,2669) 3063.39,2827.61 3044,2847 3044,3198 3216,3370 D?.1@3245,3370
  Bottom Layer w10: R?.1@2137.64,2505 2301.64,2669 v1(3063.39,2669)
NetLabel138: D?.1@3245,3575 R?.1@2027.24,2505 | length 2197.5
  Top Layer w10: R?.1@2027.24,2505 2083,2560.76 2083,3251.87 2257.13,3426 v1(2324,3426)
  Bottom Layer w10: v1(2324,3426) 3260,3426 3288,3454 3288,3532 D?.1@3245,3575
NetLabel139: D?.1@4760,3170 R?.1@1806.44,2505 | length 4401.3
  Bottom Layer w10: R?.1@1806.44,2505 1543,2768.44 1543,3099 1660,3216 1760,3216 1783,3193 1783,3140 1763,3120 1717,3120 1697,3100 1697,3027 1756.56,2967.44 4557.44,2967.44 D?.1@4760,3170
NetLabel140: D?.1@4887.5,3965 R?.1@2248.03,2505 | length 5542.5
  Top Layer w10: D?.1@4887.5,3965 4887.5,4284.14 4893.36,4290 5084.14,4290 5090,4284.14 5090,4110 5079,4099 5079,3470 5206,3343 5206,2995 5064,2853 5064,2785 v1(5022,2743)
  Bottom Layer w10: R?.1@2248.03,2505 2178.03,2435 2125,2435 2080,2480 2080,2598 2193,2711 2857,2711 2896,2750 5015,2750 v1(5022,2743)
NetLabel141: D?.1@5142.5,3965 R?.1@2468.83,2505 | length 5073.2
  Top Layer w10: R?.1@2468.83,2505 2553.83,2420 3399,2420 3419,2440 3419,2856 3531,2968 3531,3987 3506.53,4011.47 3506.53,4273 3639.53,4406 5153,4406 5205,4354 5205,4027.5 D?.1@5142.5,3965
NetLabel142: D?.1@5270,3965 R?.1@3664.32,4230 | length 2194.6
  Top Layer w10: D?.1@5270,3965 5335,4030 v1(5335,4272.56)
  Bottom Layer w10: R?.1@3664.32,4230 3724.32,4290 3907,4290 3967,4230 3967,4200 3997,4170 4824,4170 4874,4220 4874,4246.56 4947.44,4320 5287.56,4320 v1(5335,4272.56)
NetLabel143: D?.1@5270,3772.5 R?.1@3779.54,4230 | length 2185
  Top Layer w10: R?.1@3779.54,4230 3736.54,4187 3719,4187 3672.44,4140.44 3672.44,3775.56 3720,3728 v1(3797,3728)
  Bottom Layer w10: v1(3797,3728) 3890,3821 5221.5,3821 D?.1@5270,3772.5
NetLabel144: D?.1@5270,3570 R?.1@4125.23,4230 | length 2110
  Top Layer w10: R?.1@4125.23,4230 4187.79,4167.44 4493.44,4167.44 4529.07,4203.07 4529.07,4246.07 4563,4280 4609,4280 4629,4260 4629,3792 v1(4508,3671)
  Bottom Layer w10: v1(4508,3671) 4562,3617 4562,3580 4615,3527 5227,3527 D?.1@5270,3570
NetLabel145: D?.1@5142.5,3570 R?.1@4240.45,4230 | length 1732.3
  Top Layer w10: R?.1@4240.45,4230 4283.01,4187.44 4382.44,4187.44 4428,4233 4428,4285 4468,4325 5077.43,4325 5110,4292.43 5110,3995 5099.94,3984.94 5099.94,3612.56 D?.1@5142.5,3570
NetLabel146: D?.1@4887.5,3570 R?.1@4470.91,4230 | length 1161.1
  Top Layer w10: R?.1@4470.91,4230 4545.91,4305 4828,4305 4860,4273 4860,4114 4844,4098 4844,3613.5 D?.1@4887.5,3570
NetLabel147: D?.1@1997.5,3577.5 D?.1@5142.5,3240 R?.1@3572.82,2505 R?.1@4701.36,4230 | length 6732.8
  Top Layer w10: v1(1776.5,2698.5) 1850,2772 1850,2977 1912,3039 1912,3492 D?.1@1997.5,3577.5 ; R?.1@4701.36,4230 4823,4108.36 4823,3355 4843,3335 4843,3160 4866,3137 5039.5,3137 ; v1(4843,2548) 4941,2646 4941,3038.5 5039.5,3137 ; D?.1@5142.5,3240 5039.5,3137
  Bottom Layer w10: v1(1776.5,2698.5) 1861,2614 1861,2480 1973,2368 3620,2368 3651,2399 3651,2464 ; R?.1@3572.82,2505 3610,2505 3651,2464 ; v1(4843,2548) 4843,2480 4822,2459 4773,2459 4679,2365 3750,2365 3651,2464
NetLabel148: D?.1@1997.5,3170 D?.1@5270,3170 R?.1@4931.82,4230 R?.1@5118.4,2505 | length 6076.6
  Top Layer w10: v1(4425,3361) 4425,3692 4589,3856 v1(4589,4130) ; R?.1@5118.4,2505 5178.4,2445 5243,2445 5296,2498 5296,2848 5313,2865 5313,3127 D?.1@5270,3170
  Bottom Layer w10: D?.1@1997.5,3170 2040.5,3213 3422.5,3213 ; v1(4425,3361) 4425,3217 4340,3132 ; v1(4589,4130) 4680.15,4130 4700.15,4150 4851.82,4150 R?.1@4931.82,4230 ; D?.1@5270,3170 5270,3260 5247,3283 5100,3283 5054,3237 4995,3237 4925,3307 4701.81,3307 4526.81,3132 4340,3132 ; 3422.5,3213 3434,3213 3515,3132 ; 3422.5,3213 3503.5,3132 3515,3132 ; 3515,3132 4340,3132
NetLabel149: D?.1@1997.5,3965 D?.1@2992.5,3983.44 R?.1@5228.8,2505 R?.1@5277.5,4230 | length 5327.1
  Top Layer w10: R?.1@5228.8,2505 5272,2548.2 5272,2938 5227,2983 5227,4179.5 R?.1@5277.5,4230
  Bottom Layer w10: D?.1@1997.5,3965 2114.5,4082 2893.94,4082 2992.5,3983.44 3042.94,3933 3413,3933 3451,3895 3520,3895 3695,4070 4676.72,4070 4703.46,4096.75 5144.25,4096.75 R?.1@5277.5,4230
NetLabel150: D?.1@2992.5,3575 D?.1@5735,3955 R?.1@5339.2,2505 R?.1@5507.95,4230 | length 5217.2
  Top Layer w10: R?.1@5339.2,2505 5382,2547.8 5382,4104.05 5507.95,4230 5550.95,4273 5666,4273 5675,4264 5675,4015 D?.1@5735,3955
  Bottom Layer w10: D?.1@2992.5,3575 3022,3575 3298,3851 3539,3851 3603,3915 5695,3915 D?.1@5735,3955
NetLabel151: D?.1@2992.5,3170 D?.1@5735,3756.25 R?.1@5449.6,2505 R?.1@5623.18,4230 | length 4971.5
  Top Layer w10: v1(2943,2710) 2948,2715 2948,2750 2953,2755 2953,2848 2949,2852 2949,3126.5 D?.1@2992.5,3170 ; R?.1@5449.6,2505 5449.6,2689.6 5504,2744 5504,3525.25 5735,3756.25 5623.18,3868.07 R?.1@5623.18,4230
  Bottom Layer w10: v1(2943,2710) 2944,2711 3914,2711 3955,2670 4283.95,2670 4290.95,2677 5277.6,2677 R?.1@5449.6,2505
NetLabel152: D?.1@3985,3965 D?.1@5735,3567.5 R?.1@4676.81,2505 R?.1@5968.86,4230 | length 5363.1
  Top Layer w10: D?.1@3985,3965 4065,4045 v1(4065,4273) ; v1(4636,3322) 4636,3269.47 4620,3253.47 4620,2732.76 4582,2694.76 4582,2599.81 R?.1@4676.81,2505 ; D?.1@5735,3567.5 5692,3610.5 5692,3681 5724.69,3713.69 5761.25,3713.69 5777.56,3730 5777.56,3799 5710,3812 5692,3830 5692,3880 5720,3908 5806,3908 5968.86,4070.86 R?.1@5968.86,4230
  Bottom Layer w10: v1(4065,4273) 4132,4340 5858.86,4340 R?.1@5968.86,4230 ; v1(4636,3322) 4734,3420 5442,3420 5589.5,3567.5 D?.1@5735,3567.5
NetLabel153: D?.1@3985,3570 D?.1@5735,3358.75 R?.1@4787.21,2505 R?.1@6084.09,4230 | length 5095.4
  Top Layer w10: D?.1@3985,3570 3942,3527 3942,3232 3966.58,3207.42 3966.58,2458.42 3979.68,2445.32 3979.68,2438.25 4003,2414.93 v1(4003,2405) ; R?.1@4787.21,2505 4859.21,2433 v1(4889,2433) ; v1(5517,2353) 5517,2642 5603,2728 5603,3226.75 D?.1@5735,3358.75 ; R?.1@6084.09,4230 6143.08,4171.01 6143.08,3792.92 v1(6172,3764)
  Bottom Layer w10: v1(4003,2405) 4687.21,2405 R?.1@4787.21,2505 ; v1(4889,2433) 4969,2353 v1(5517,2353) ; D?.1@5735,3358.75 5781.19,3404.94 5924.94,3404.94 6172,3652 v1(6172,3764)
NetLabel154: D?.1@5015,3965 D?.1@5735,3170 R?.1@4897.61,2505 R?.1@6199.32,4230 | length 4753
  Top Layer w10: v1(5634,2430) 5666,2462 5666,3101 D?.1@5735,3170
  Bottom Layer w10: R?.1@4897.61,2505 4972.61,2430 v1(5634,2430) ; D?.1@5015,3965 5057.56,4007.56 5976.88,4007.56 6199.32,4230 6249.32,4280 6568,4280 6588,4260 6588,4002 5903,3317 5820,3317 5796,3293 5796,3231 D?.1@5735,3170
NetLabel155: D?.1@5015,3570 D?.1@5860,3675 R?.1@4124.81,2505 R?.1@6314.54,4230 | length 3599.3
  Top Layer w10: R?.1@4124.81,2505 4189.81,2440 4349,2440 4389,2480 4389,2937 4596,3144 4596,3568 v1(4622,3594)
  Bottom Layer w10: v1(4622,3594) 4652,3624 4961,3624 5015,3570 5067,3622 5344,3622 5423,3701 5834,3701 5860,3675 5860,3775.46 R?.1@6314.54,4230
NetLabel156: D?.1@5015,3280 D?.1@5960,3805 R?.1@4456.01,2505 R?.1@6429.77,4230 | length 3671.8
  Top Layer w10: R?.1@4456.01,2505 4615.01,2346 4940,2346 4965,2371 4965,2899 5185.06,3119.06 5185.06,3260 5162.5,3282.56 5057,3282.56 5054.44,3280 D?.1@5015,3280
  Bottom Layer w10: D?.1@5015,3280 5053,3318 5410,3318 5616,3524 5880,3524 5903,3547 5903,3748 5960,3805 6385,4230 R?.1@6429.77,4230
NetLabel157: D?.1@6195,3950 R?.1@4566.41,2505 | length 3485.7
  Top Layer w10: R?.1@4566.41,2505 4684.41,2387 v1(4790,2387) ; D?.1@6195,3950 6305,3840 v1(6305,2340)
  Bottom Layer w10: v1(4790,2387) 4865,2312 6277,2312 v1(6305,2340)
NetLabel158: D?.1@5870,3460 R?.1@2910.43,2505 | length 4329.3
  Top Layer w10: R?.1@2910.43,2505 2953,2505 2995.56,2462.44 3040,2462.44 3063.39,2485.83 3063.39,2548 2986,2625.39 2986,2757 2978,2765 2978,2982 v1(3004,3008)
  Bottom Layer w10: v1(3004,3008) 3022,2990 4476,2990 4699,3213 4870,3213 5055.56,3027.44 5764.44,3027.44 5778,3041 5778,3100 5751,3127 5705,3127 5692,3140 5692,3400 5716.94,3424.94 5834.94,3424.94 D?.1@5870,3460
NetLabel159: D?.1@5990,3335 R?.1@3131.23,2505 | length 3961.8
  Top Layer w10: v1(3743,2578) 3908.58,2578 3946.58,2540 3946.58,2400 4044.58,2302 5652,2302 5690,2340 5690,2777 6033,3120 6033,3292 D?.1@5990,3335
  Bottom Layer w10: R?.1@3131.23,2505 3211.23,2585 3736,2585 v1(3743,2578)
NetLabel160: D?.1@6226.95,3170 R?.1@3352.02,2505 | length 3672.1
  Top Layer w10: v1(3339,2906) 3309,2876 3309,2548.02 R?.1@3352.02,2505
  Bottom Layer w10: v1(3339,2906) 5696.12,2906 5818,3027.88 5818,3256 5840,3278 6040,3278 6063,3255 6063,3220 6088,3195 6201.95,3195 D?.1@6226.95,3170
copper on no net:
  other v2: 1450,4705 6580,4715

## Keep-outs
Keep-Out Layer:
  lines w10: 1335,2275 6695,2275 6695,4825 1335,4825 1335,2275

## Text inside footprints (layer, text, board x,y; h text height)
?: Top Overlay "ON" at 6765,2785 h60 r90